# EAGLE board breakout3 (EAGLE 7.5.0)
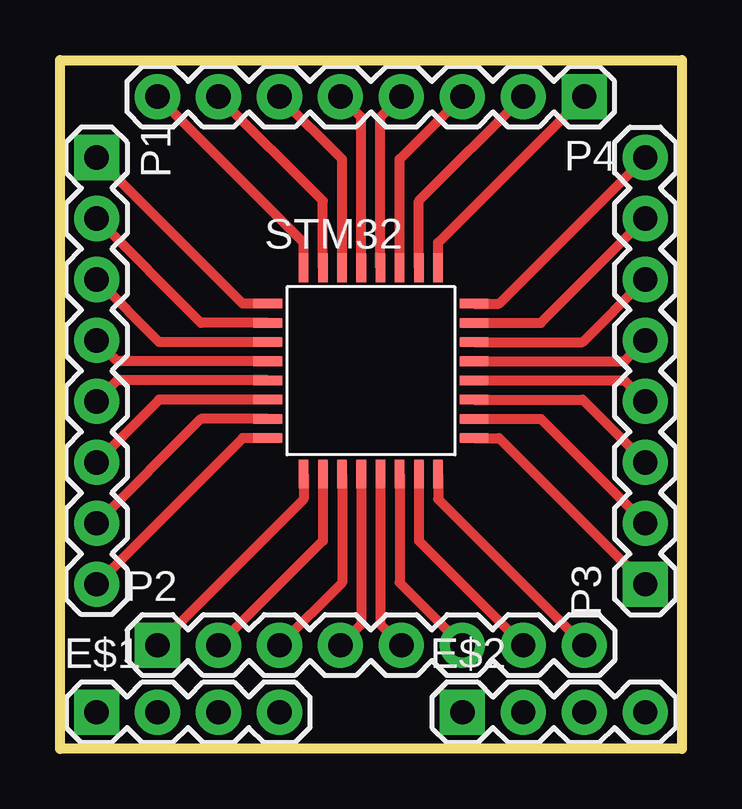
[diagram p0: board, top side]
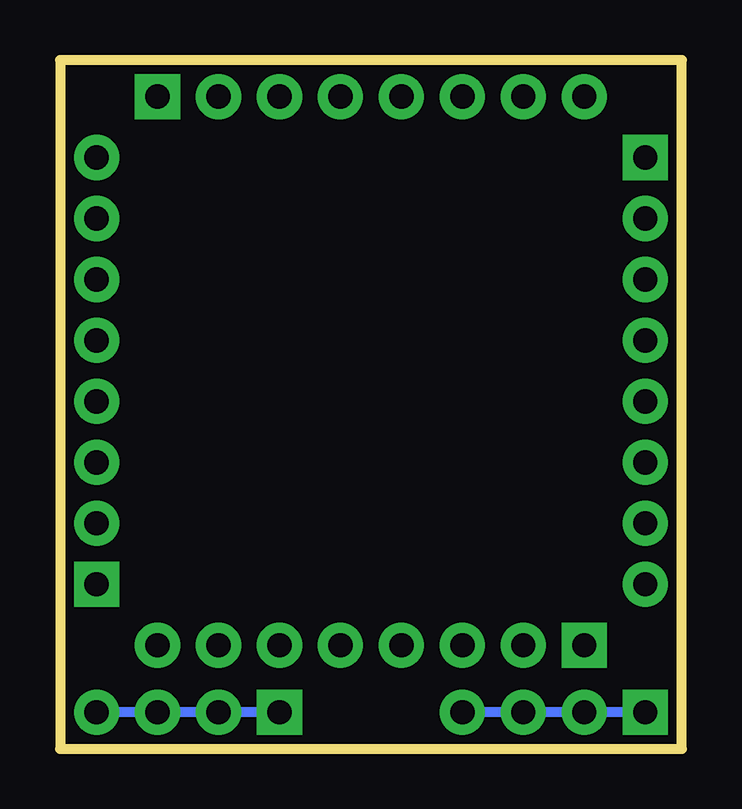
[diagram p1: board, bottom side, seen from below]

Size 25.91 x 28.7 mm. Coordinates in mm from the lower left corner, seen from the top.
Outline: 0,28.7 25.91,28.7 25.91,0 0,0 0,28.7
Copper layers (1*16): Top 0.035mm / dielectric 1.5mm / Bottom 0.035mm
Design rules "default": minimum track width 10mil, minimum drill 24mil, track to track 8mil, track to pad 8mil, pad to pad 8mil, via to via 8mil, smd to smd 8mil, copper to edge 40mil, drill to drill 8mil, minimum pad ring 10mil, minimum via ring 8mil, stop-mask expansion 4mil, vias tented up to drill 0mil, thermal gap 10mil

## Footprints (pad centres in the part's own frame; a part is rotated, then mirrored left to right if it is on the bottom)
1X04 = drill 1.016 pad 1.88 square: 1 0,0 | drill 1.016 pad 1.88: 2 2.54,0; 3 5.08,0; 4 7.62,0
1X08 = drill 1.016 pad 1.88 square: 1 0,0 | drill 1.016 pad 1.88: 2 2.54,0; 3 5.08,0; 4 7.62,0; 5 10.16,0; 6 12.7,0; 7 15.24,0; 8 17.78,0
LQFP32-7X7 = smd 1.2 x 0.4: 1 -4.3,2.8; 2 -4.3,2; 3 -4.3,1.2; 4 -4.3,0.4; 5 -4.3,-0.4; 6 -4.3,-1.2; 7 -4.3,-2; 8 -4.3,-2.8; 17 4.3,-2.8; 18 4.3,-2; 19 4.3,-1.2; 20 4.3,-0.4; 21 4.3,0.4; 22 4.3,1.2; 23 4.3,2; 24 4.3,2.8 | smd 0.4 x 1.2: 9 -2.8,-4.3; 10 -2,-4.3; 11 -1.2,-4.3; 12 -0.4,-4.3; 13 0.4,-4.3; 14 1.2,-4.3; 15 2,-4.3; 16 2.8,-4.3; 25 2.8,4.3; 26 2,4.3; 27 1.2,4.3; 28 0.4,4.3; 29 -0.4,4.3; 30 -1.2,4.3; 31 -2,4.3; 32 -2.8,4.3

## Placement (x,y rotation side)
E$1  [1X04]  1.52,1.52 0 top
E$2  [1X04]  16.76,1.52 0 top
P1  [1X08]  1.52,24.64 270 top
P2  [1X08]  4.06,4.32 0 top
P3  [1X08]  24.38,6.86 90 top
P4  [1X08]  21.84,27.18 180 top
STM32  [LQFP32-7X7]  12.95,15.75 0 top

## Library data of the parts
E$1 E$2 P1-P4 = SparkFun-Connectors
STM32 = st-microelectronics

## Nets
BOOT0: P4.7 STM32.31
GND: P2.8 STM32.16
NRST: P1.4 STM32.4
PA0: P1.6 STM32.6
PA1: P1.7 STM32.7
PA2: P1.8 STM32.8
PA3: P2.1 STM32.9
PA4: P2.2 STM32.10
PA5: P2.3 STM32.11
PA6: P2.4 STM32.12
PA7: P2.5 STM32.13
PA8: P3.2 STM32.18
PA9: P3.3 STM32.19
PA10: P3.4 STM32.20
PA11: P3.5 STM32.21
PA12: P3.6 STM32.22
PA13: P3.7 STM32.23
PA14: P3.8 STM32.24
PA15: P4.1 STM32.25
PB0: P2.6 STM32.14
PB1: P2.7 STM32.15
PB3: P4.2 STM32.26
PB4: P4.3 STM32.27
PB5: P4.4 STM32.28
PB6: P4.5 STM32.29
PB7: P4.6 STM32.30
PF0: P1.2 STM32.2
PF1: P1.3 STM32.3
S$1: P1.1 STM32.1
S$3: E$1.1 E$1.2 E$1.3 E$1.4
S$5: P4.8 STM32.32
S$6: P1.5 STM32.5
S$7: E$2.1 E$2.2 E$2.3 E$2.4
VDD: P3.1 STM32.17

## Tracks (layer width: path | path; a pad name or v marks a point on that pad's centre or on a via)
BOOT0
  Top 0.406: STM32.31 10.95,22.83 P4.7
GND
  Top 0.406: STM32.16 15.75,10.41 P2.8
NRST
  Top 0.406: STM32.4 2.39,16.15 P1.4
PA0
  Top 0.406: STM32.6 4.13,14.55 P1.6
PA1
  Top 0.406: STM32.7 5.87,13.75 P1.7
PA2
  Top 0.406: STM32.8 7.61,12.95 P1.8
PA3
  Top 0.406: STM32.9 10.15,10.41 P2.1
PA4
  Top 0.406: STM32.10 10.95,8.67 P2.2
PA5
  Top 0.406: STM32.11 11.75,6.93 P2.3
PA6
  Top 0.406: STM32.12 12.55,5.19 P2.4
PA7
  Top 0.406: STM32.13 13.35,5.19 P2.5
PA8
  Top 0.406: STM32.18 20.03,13.75 P3.2
PA9
  Top 0.406: STM32.19 21.77,14.55 P3.3
PA10
  Top 0.406: STM32.20 23.51,15.35 P3.4
PA11
  Top 0.406: STM32.21 23.51,16.15 P3.5
PA12
  Top 0.406: STM32.22 21.77,16.95 P3.6
PA13
  Top 0.406: STM32.23 20.03,17.75 P3.7
PA14
  Top 0.406: STM32.24 18.29,18.55 P3.8
PA15
  Top 0.406: STM32.25 15.75,21.09 P4.1
PB0
  Top 0.406: STM32.14 14.15,6.93 P2.6
PB1
  Top 0.406: STM32.15 14.95,8.67 P2.7
PB3
  Top 0.406: STM32.26 14.95,22.83 P4.2
PB4
  Top 0.406: STM32.27 14.15,24.57 P4.3
PB5
  Top 0.406: STM32.28 13.35,26.31 P4.4
PB6
  Top 0.406: STM32.29 12.55,26.31 P4.5
PB7
  Top 0.406: STM32.30 11.75,24.57 P4.6
PF0
  Top 0.406: STM32.2 5.87,17.75 P1.2
PF1
  Top 0.406: STM32.3 4.13,16.95 P1.3
S$1
  Top 0.406: STM32.1 7.61,18.55 P1.1
S$3
  Bottom 0.406: E$1.1 E$1.2 E$1.3 E$1.4
S$5
  Top 0.406: STM32.32 10.15,21.09 P4.8
S$6
  Top 0.406: STM32.5 2.39,15.35 P1.5
S$7
  Bottom 0.406: E$2.1 E$2.2 E$2.3 E$2.4
VDD
  Top 0.406: STM32.17 18.29,12.95 P3.1